# Altium PCB OPAMP_TESTER.PcbDoc
Units mil, origin at the board's own origin, x right, y up, seen from the top; angles counter-clockwise.
Board outline 7760.03 x 6465.03 mil, 2 copper layers (Top Layer, Bottom Layer); 154 components, 57 nets, 554 pads, 0 vias.
Unrouted connection lines stored in the file: 16.
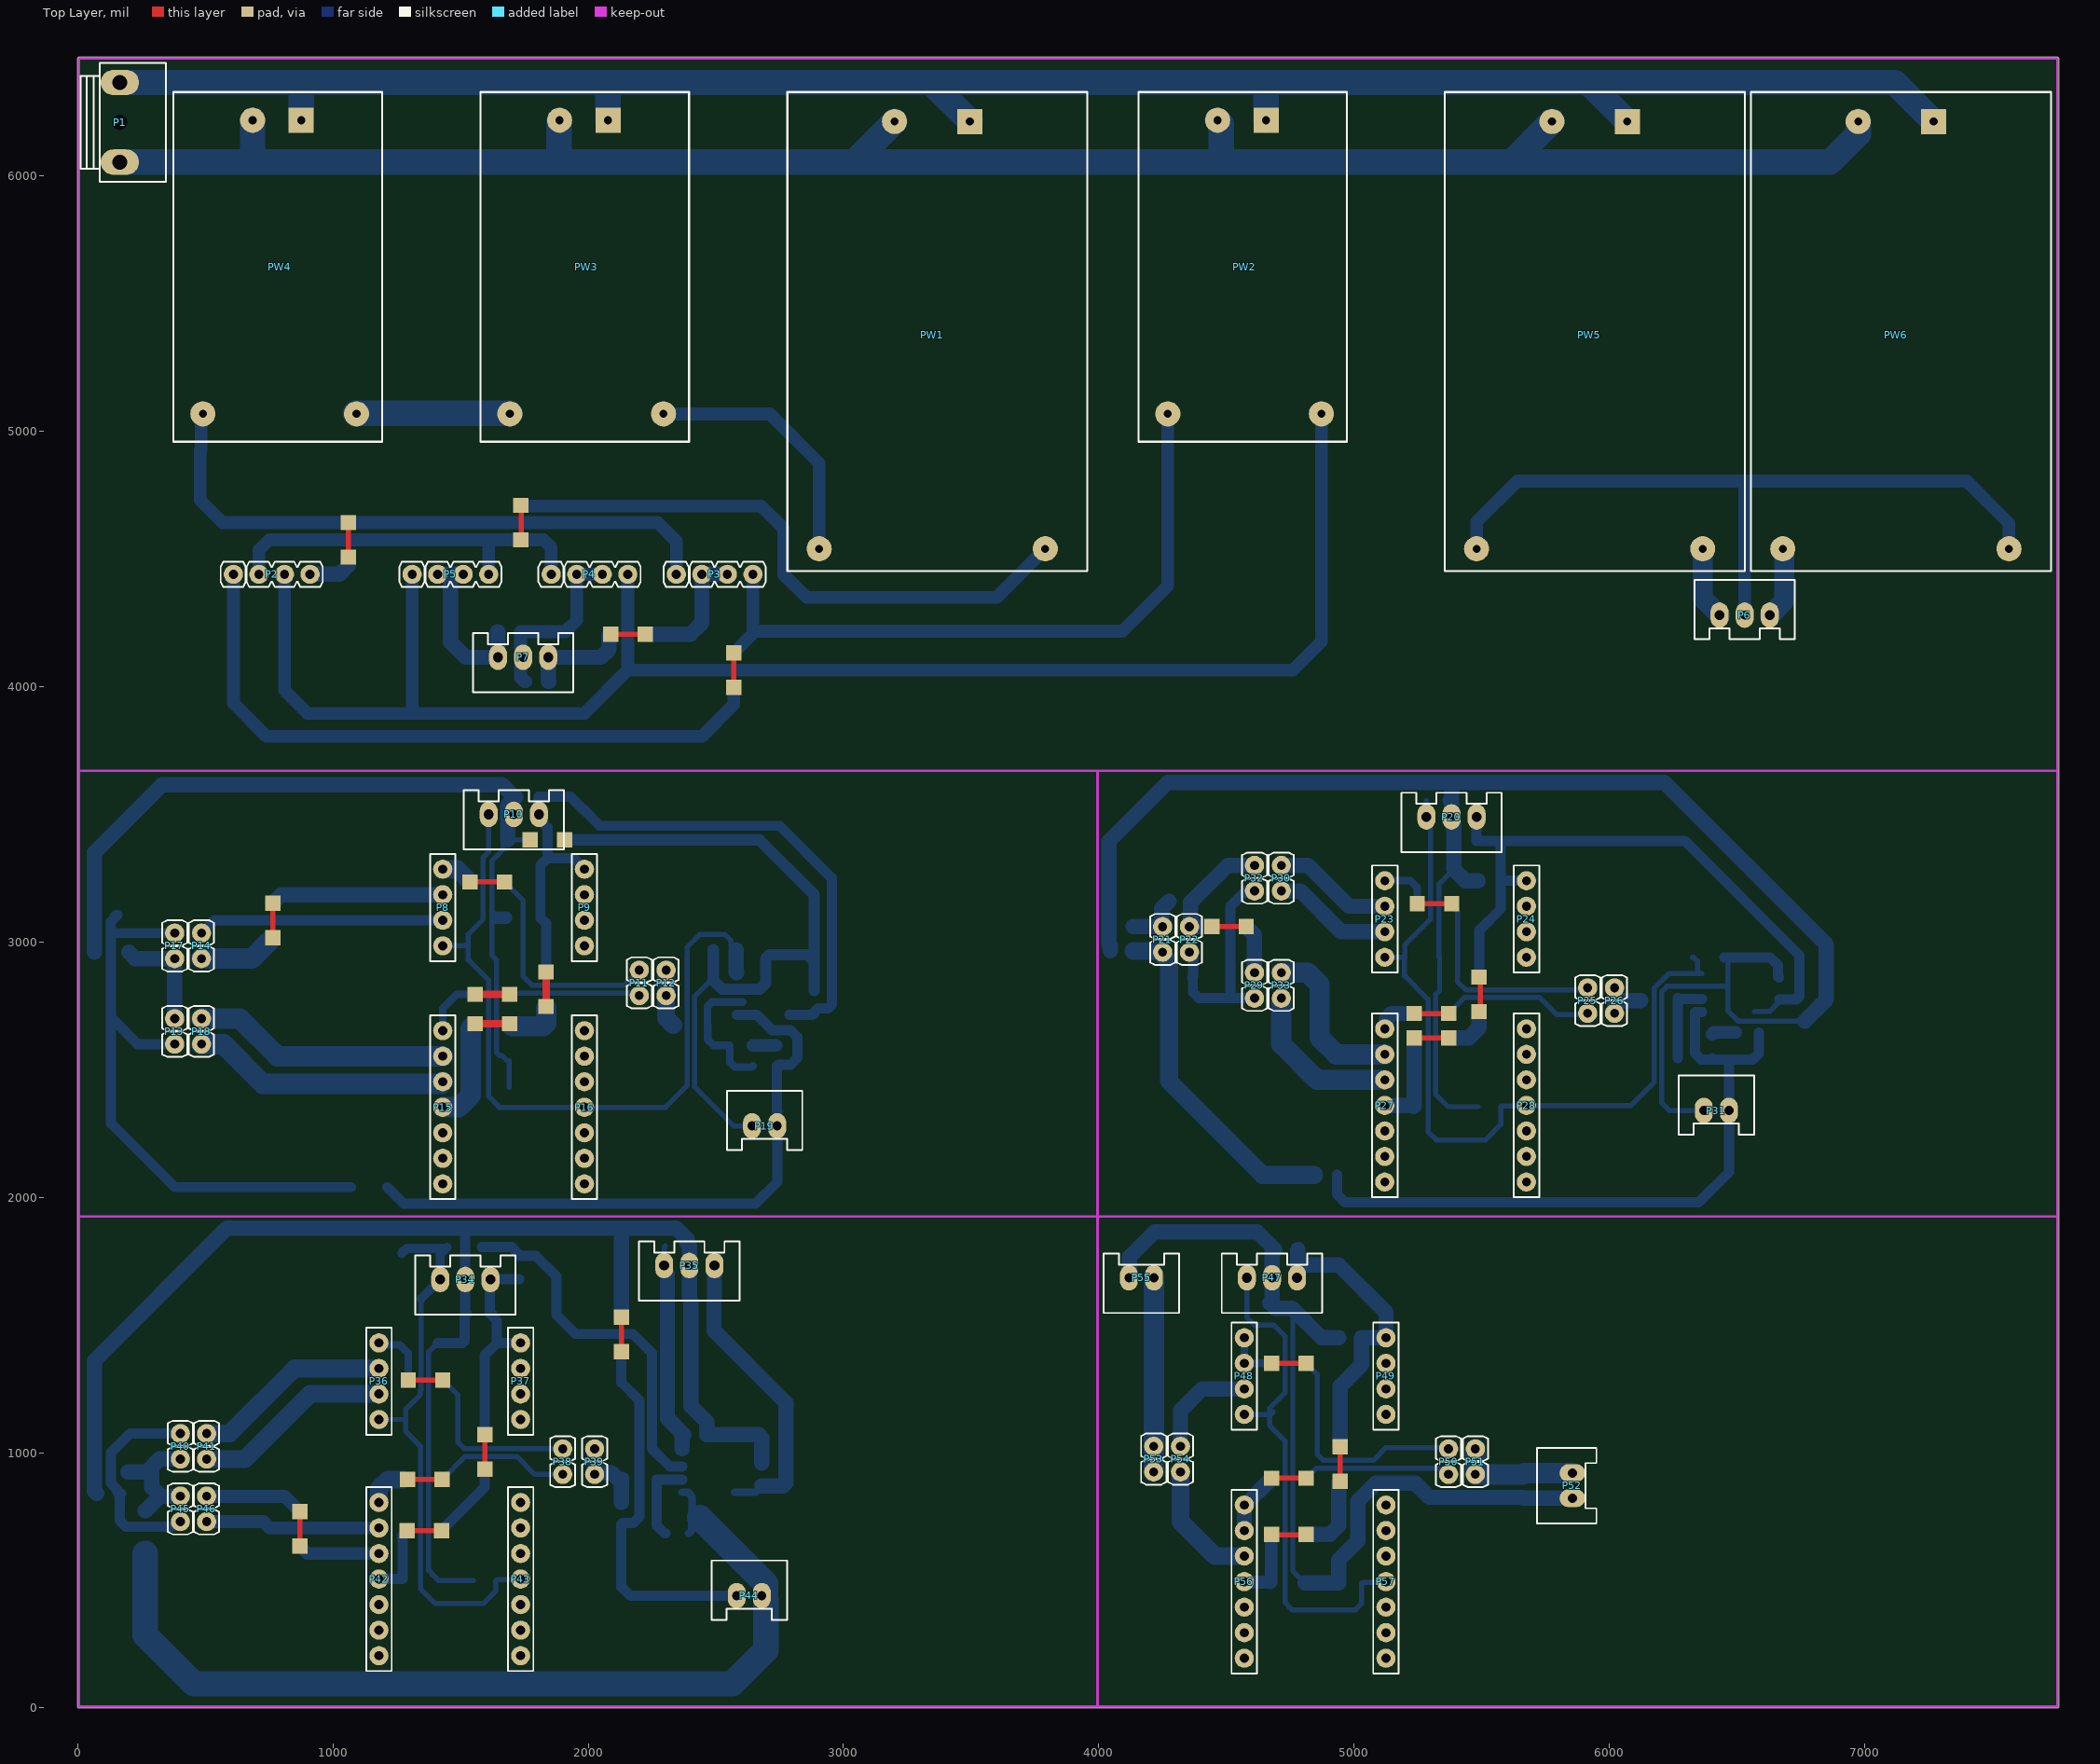
[diagram p0: Top Layer view]
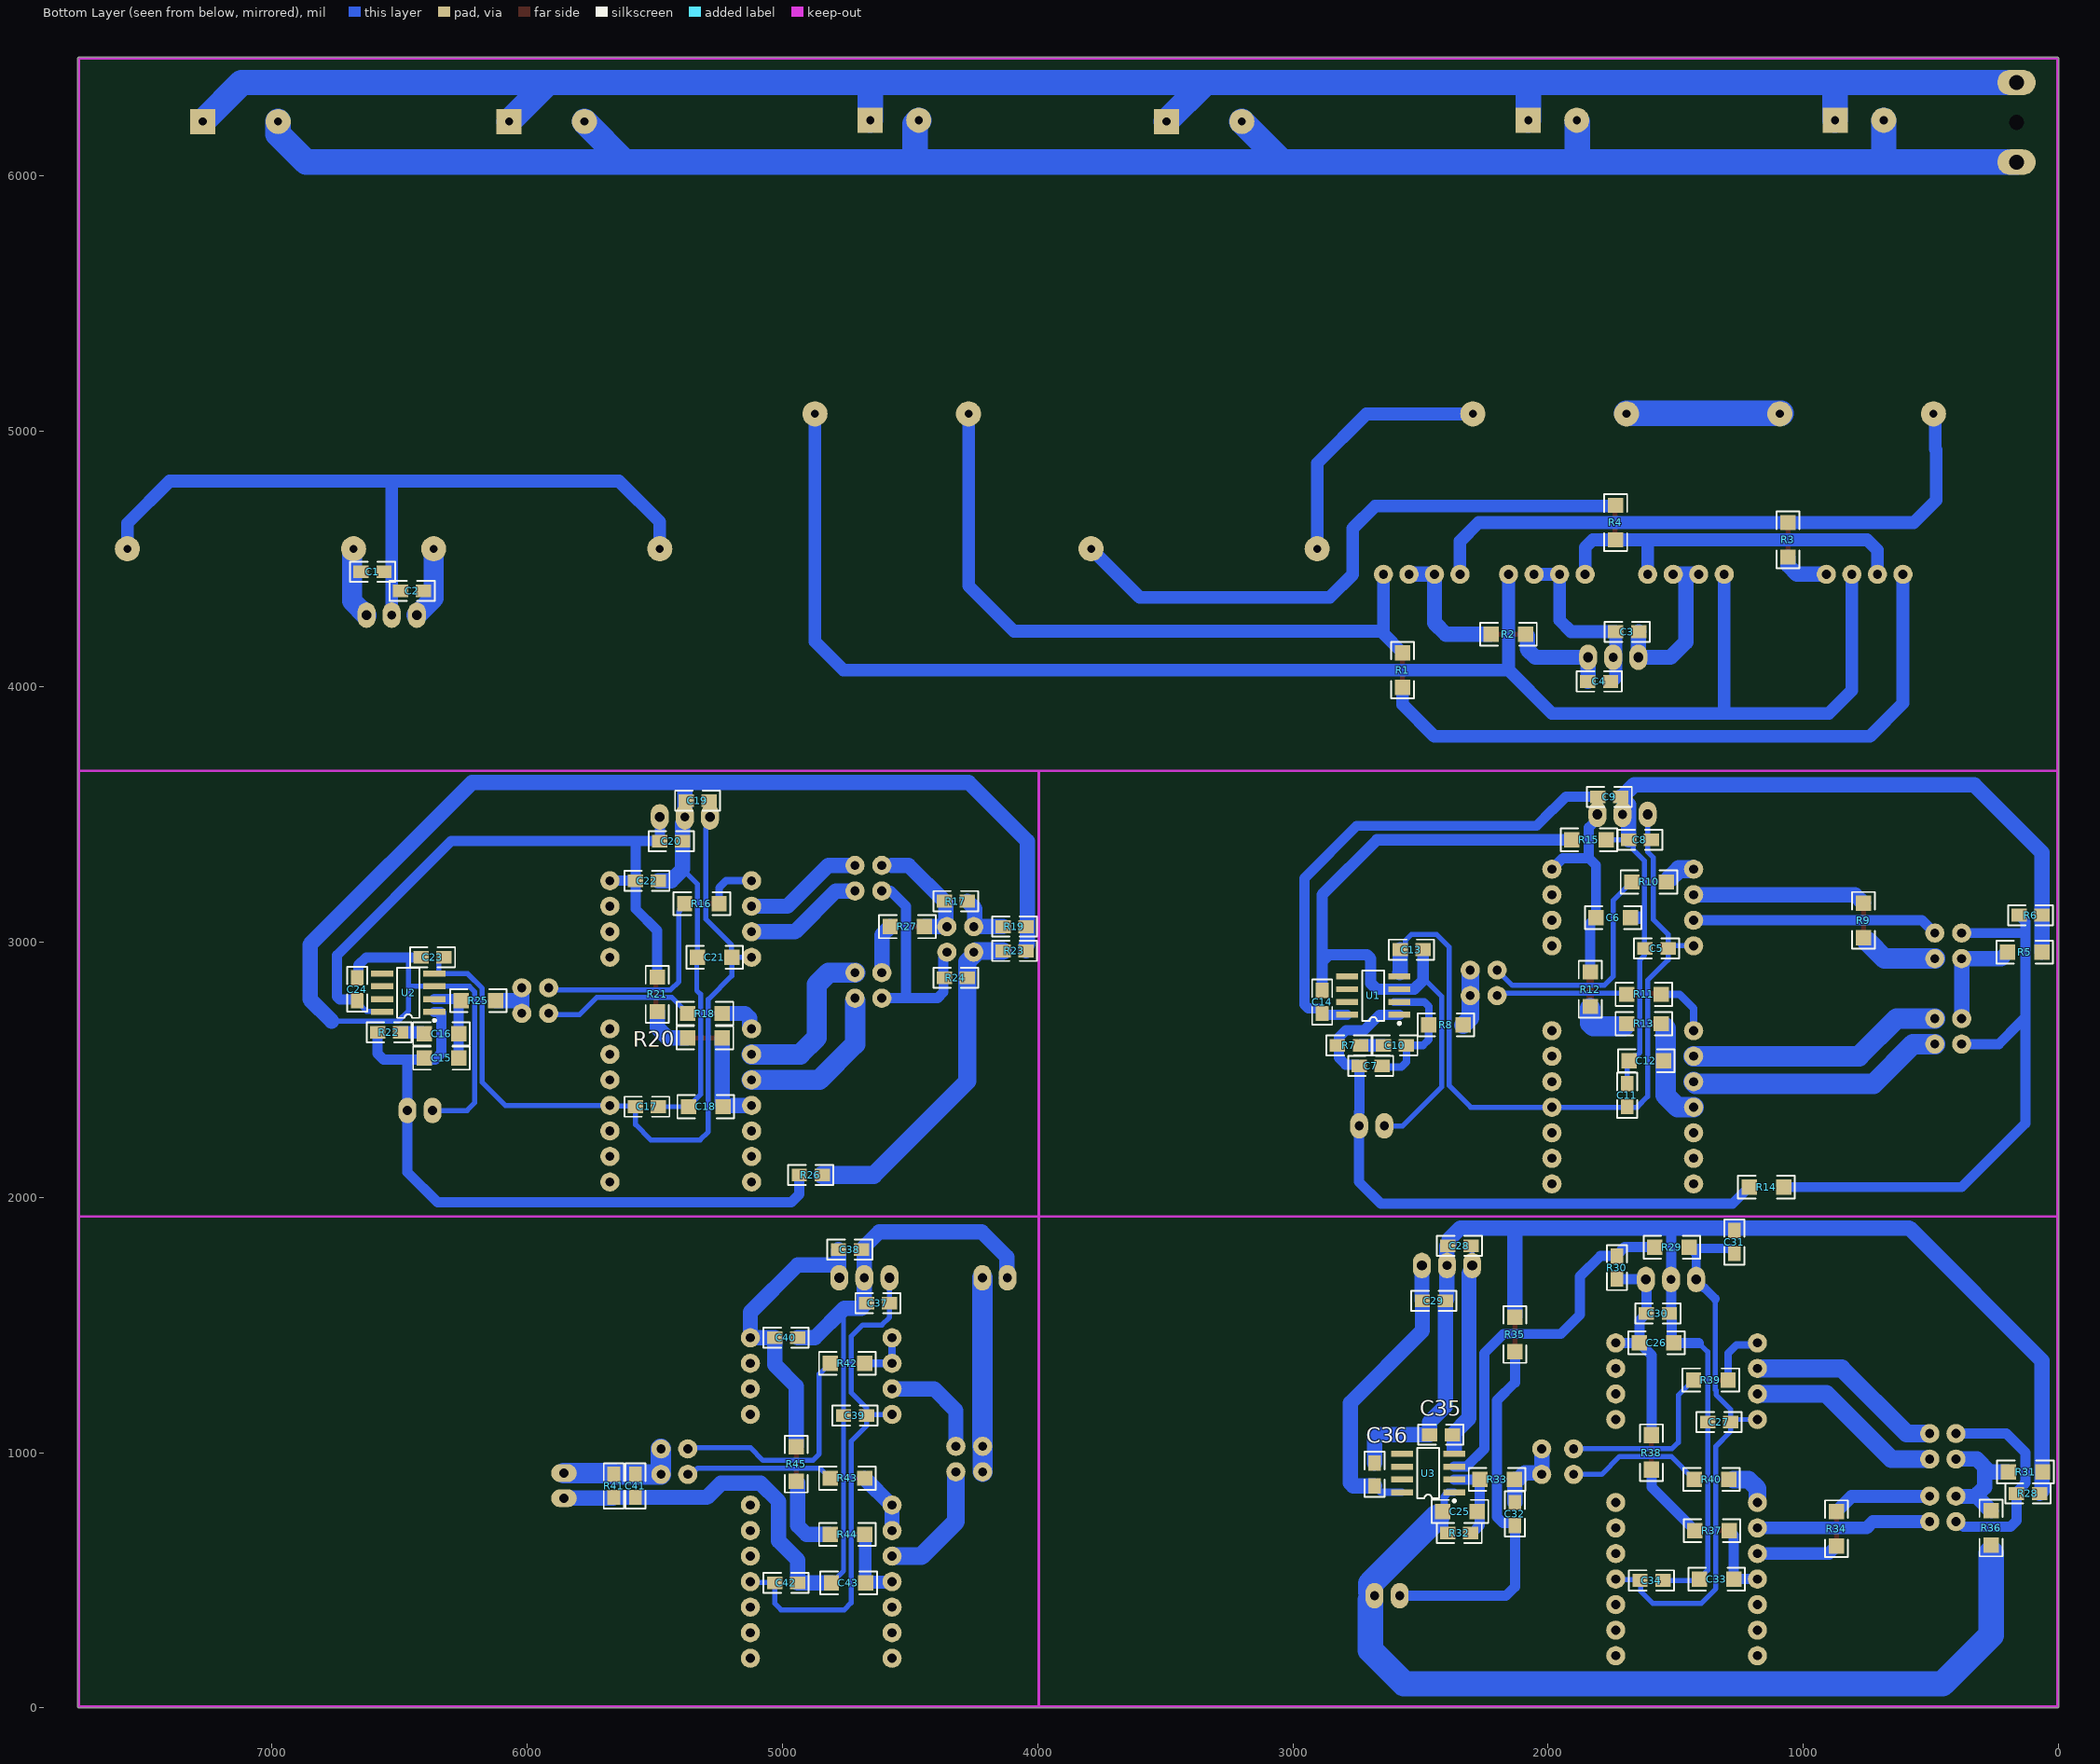
[diagram p1: Bottom Layer view, seen from below]
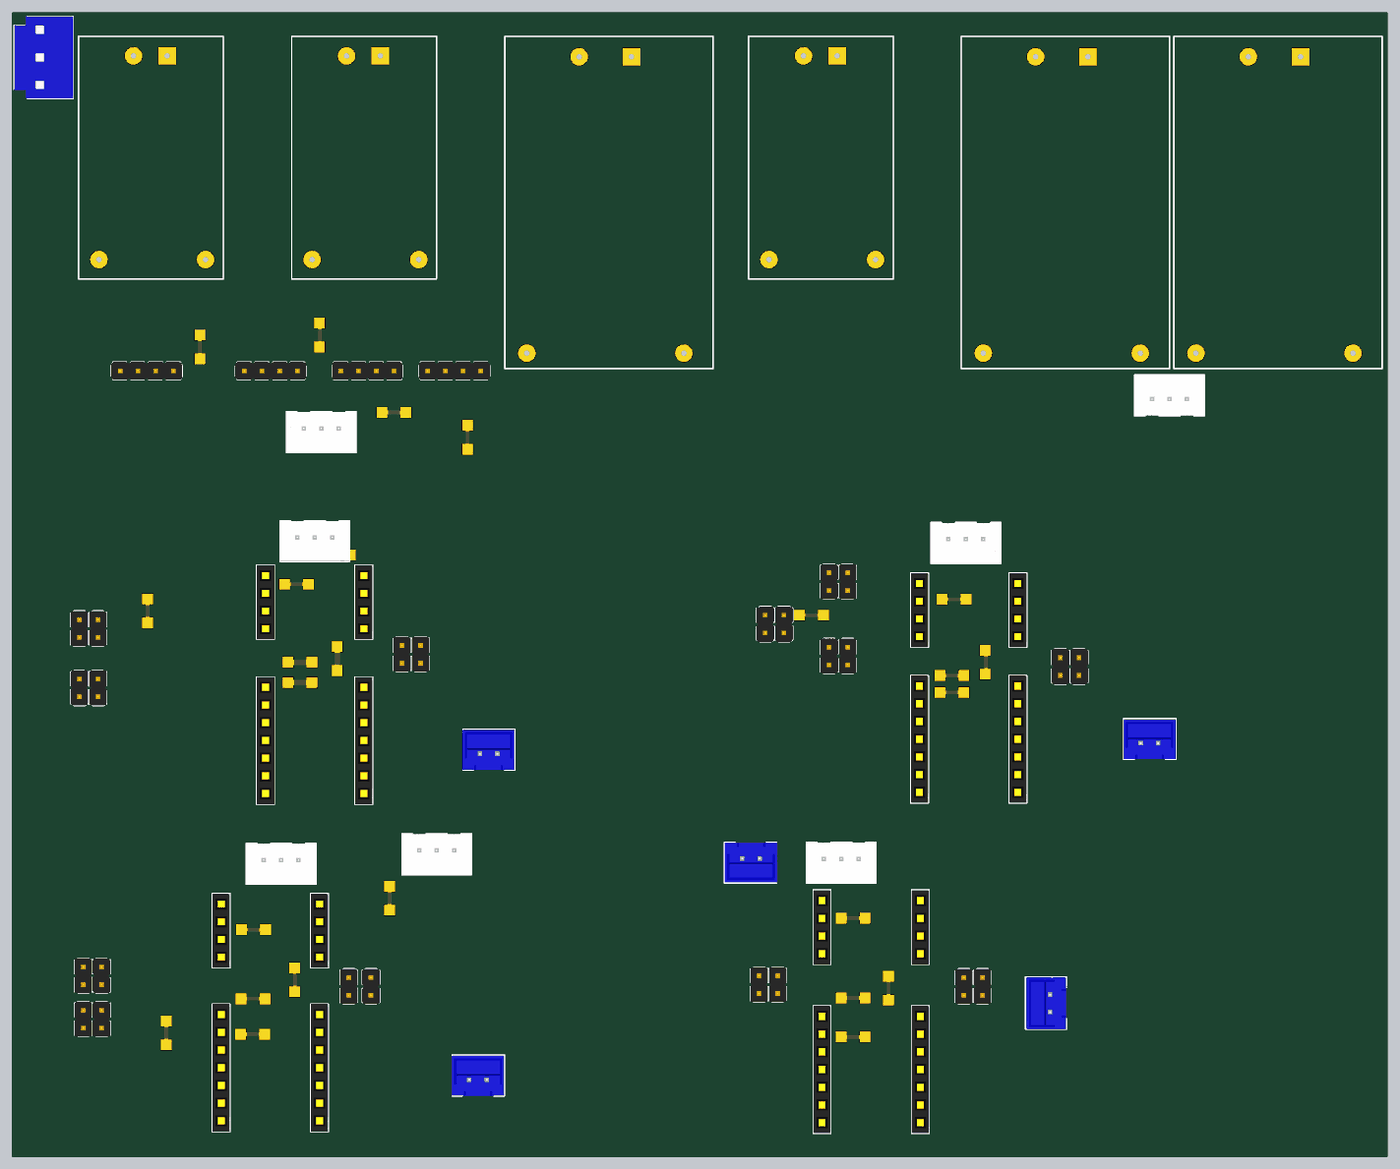
[diagram p2: 3D render of the assembled board from above, using the file's embedded part models]
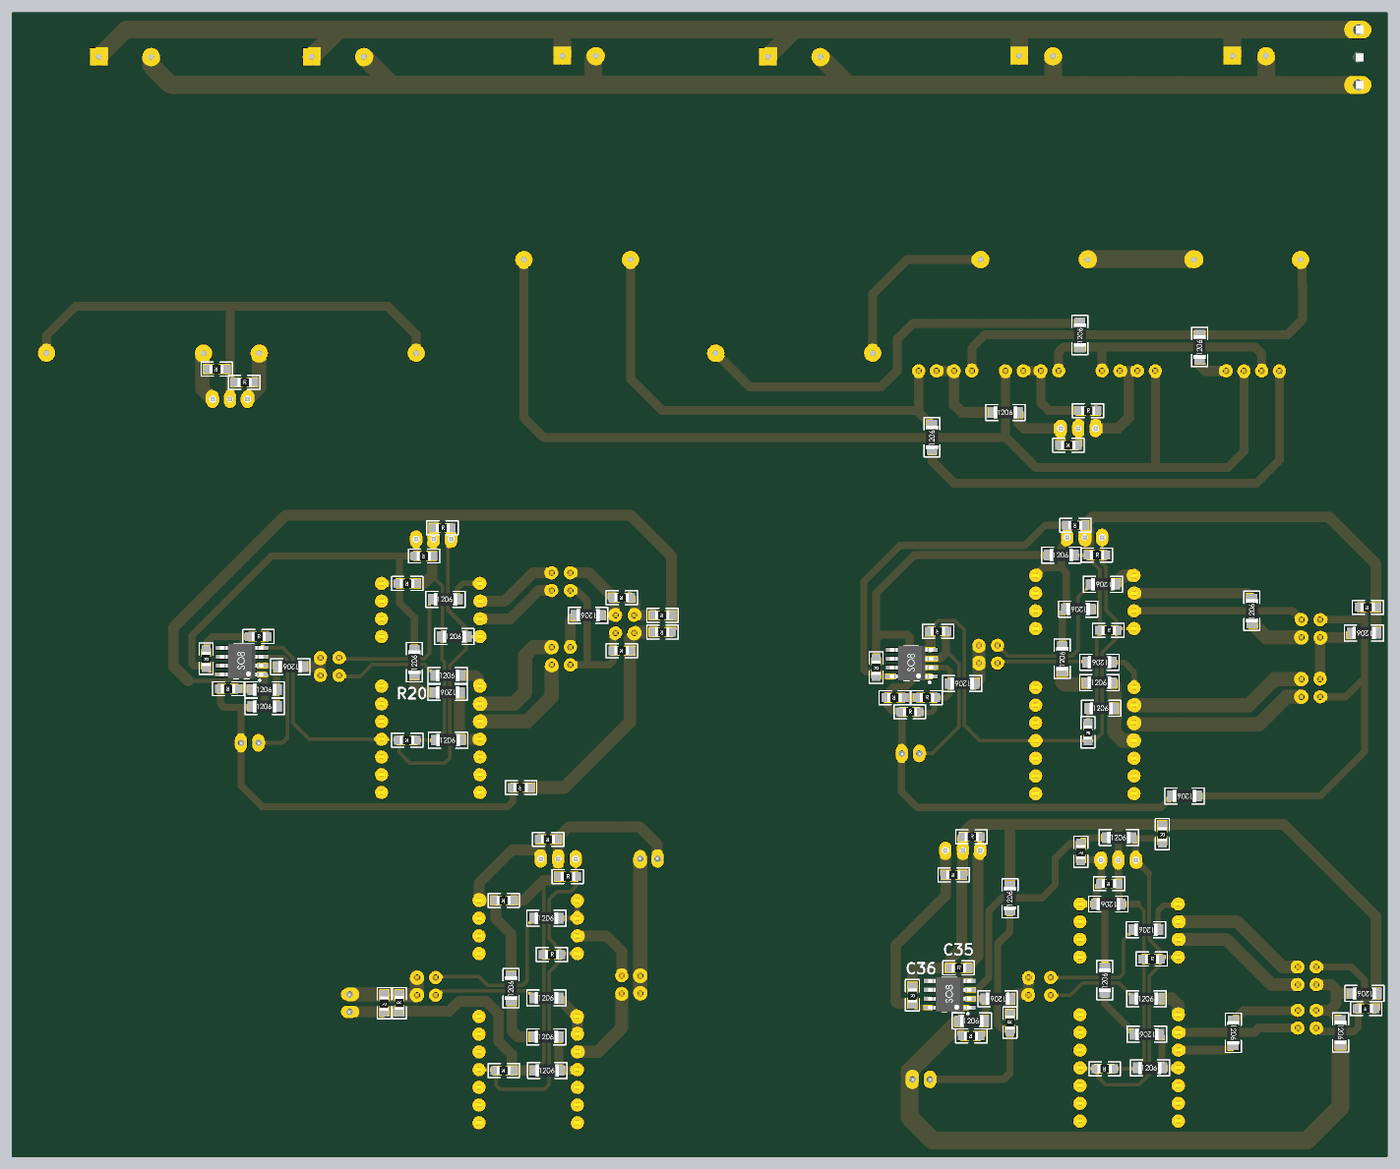
[diagram p3: 3D render of the assembled board from below, using the file's embedded part models]

## Layer stack, top to bottom
Top Solder: solder mask 0.4, Solder Resist, Dk 3.5
Top Layer: signal copper 1.4
Dielectric 1: dielectric 12.6, FR-4, Dk 4.8
Bottom Layer: signal copper 1.4
Bottom Solder: solder mask 0.4, Solder Resist, Dk 3.5

## Board outline
5,-0.01 cw(c5,5) -0.01,5 -0.01,6460 cw(c5,6460) 5,6465.02 7755,6465.02 cw(c7755,6460) 7760.02,6460 7760.02,5 cw(c7755,5) 7755,-0.01

## Design rules (kind name [scope] priority, off if disabled: settings)
Clearance [All] p1: gap=10 ignorepadtopadclearanceinfootprint=FALSE except(0: Arc-Hole Track-Hole SMDPad-Hole THPad-Hole Via-Hole Fill-Hole Poly-Hole Region-Hole Text-Hole)
PolygonConnect [All] p1: connectstyle=Relief reliefconductorwidth=10 reliefentries=4 polygonreliefangle="90 Angle" airgapwidth=10
RoutingVias [All] p1: holewidth=28 width=50 viastyle="Through Hole" minholewidth=28 minwidth=50 maxholewidth=50 maxwidth=500
SolderMaskExpansion [All] p1: expansion=4 istentingtop=FALSE
Width [All] p1: maxlimit=100 minlimit=10 preferedwidth=10
30 further rules are at their usual default settings.

## Classes and differential pairs
component class OPAMP_TESTER: C1 C2 C3 C4 P1 P2 P3 P4 P5 P6 P7 PW1 PW2 PW3 PW4 PW5 PW6 R1 R2 R3 R4
component class OPAMP_TESTER_2: C25 C26 C27 C28 C29 C30 C31 C32 C33 C34 C35 C36 C37 C38 C39 C40 C41 C42 C43 P34 P35 P36 P37 P38 P39 P40 P41 P42 P43 P44 P45 P46 P47 P48 P49 P50 P51 P52 P53 P54 P55 P56 P57 R28 R29 R30 R31 R32 R33 R34 R35 R36 R37 R38 R39 R40 R41 R42 R43 R44 R45 U3
component class OPAMP_TESTER_1: C5 C6 C7 C8 C9 C10 C11 C12 C13 C14 C15 C16 C17 C18 C19 C20 C21 C22 C23 C24 P8 P9 P10 P11 P12 P13 P14 P15 P16 P17 P18 P19 P20 P21 P22 P23 P24 P25 P26 P27 P28 P29 P30 P31 P32 P33 R5 R6 R7 R8 R9 R10 R11 R12 R13 R14 R15 R16 R17 R18 R19 R20 R21 R22 R23 R24 R25 R26 R27 U1 U2

## Components (designator, comment, footprint, x,y, rotation, side; value= is the part's Value field where it differs from the comment)
C1 "100nF" "SMD 0805" 6605,4450 r0 bottom
C2 "100nF" "SMD 0805" 6450,4375 r180 bottom
C3 "100nF" "SMD 0805" 1690,4215 r180 bottom
C4 "100nF" "SMD 0805" 1800,4020 r0 bottom
C5 "100nF" "SMD 0805" 1575,2975 r180 bottom
C6 "100nF" "SMD 1206" 1745,3095 r0 bottom
C7 "1uF" "SMD 0805" 2695,2515 r180 bottom
C8 "100nF" "SMD 0805" 1640,3400 r180 bottom
C9 "100nF" "SMD 0805" 1760.21,3568.31 r0 bottom
C10 "1uF" "SMD 0805" 2600,2595 r180 bottom
C11 "100nF" "SMD 0805" 1690,2400 r270 bottom
C12 "100nF" "SMD 1206" 1615,2535 r180 bottom
C13 "100nF" "SMD 0805" 2535,2970 r0 bottom
C14 "100nF" "SMD 0805" 2885,2765 r270 bottom
C15 "1uF" "SMD 1206" 6335,2545 r180 bottom
C16 "1uF" "SMD 1206" 6335,2640 r180 bottom
C17 "100nF" "SMD 0805" 5530,2355 r0 bottom
C18 "100nF" "SMD 1206" 5300,2355 r180 bottom
C19 "100nF" "SMD 0805" 5331.66,3553.67 r180 bottom
C20 "100nF" "SMD 0805" 5435,3395 r0 bottom
C21 "100nF" "SMD 1206" 5265,2940 r180 bottom
C22 "100nF" "SMD 0805" 5530,3240 r0 bottom
C23 "100nF" "SMD 0805" 6370,2940 r180 bottom
C24 "100nF" "SMD 0805" 6665,2815 r270 bottom
C25 "1uF" "SMD 1206" 2345,770 r180 bottom
C26 "100nF" "SMD 1206" 1575,1430 r0 bottom
C27 "100nF" "SMD 0805" 1330,1120 r180 bottom
C28 "100nF" "SMD 0805" 2347.5,1809.77 r180 bottom
C29 "100nF" "SMD 0805" 2447.5,1594.77 r0 bottom
C30 "100nF" "SMD 0805" 1570,1545 r0 bottom
C31 "100nF" "SMD 0805" 1270,1825 r270 bottom
C32 "1uF" "SMD 0805" 2130,760 r90 bottom
C33 "100nF" "SMD 1206" 1340,505 r180 bottom
C34 "100nF" "SMD 0805" 1595,500 r0 bottom
C35 "100nF" "SMD 0805" 2420,1070 r180 bottom
C36 "100nF" "SMD 0805" 2680,915 r270 bottom
C37 "100nF" "SMD 0805" 4625,1585 r180 bottom
C38 "100nF" "SMD 0805" 4735,1795 r0 bottom
C39 "100nF" "SMD 0805" 4715,1145 r180 bottom
C40 "100nF" "SMD 0805" 4985,1450 r0 bottom
C41 "100pF" "SMD 0805" 5575,870 r90 bottom
C42 "100nF" "SMD 0805" 4985,490 r0 bottom
C43 "100nF" "SMD 1206" 4740,490 r180 bottom
P1 "CONNECTOR 3" "CON VH 3" 165,6054.09 r90 top
P2 "CONNECTOR 4" "CON HDR 2.54M 4" 610,4440 r0 top
P3 "CONNECTOR 4" "CON HDR 2.54M 4" 2345,4440 r0 top
P4 "CONNECTOR 4" "CON HDR 2.54M 4" 1855,4440 r0 top
P5 "CONNECTOR 4" "CON HDR 2.54M 4" 1310,4440 r0 top
P6 "INPUT_12+-V" "CON XH 3" 6628.43,4280 r180 top
P7 "INPUT_12+-V" "CON XH 3" 1646.57,4115 r0 top
P8 "LM358_DUT" "CON HDR 2.54FM 4" 1430,3285 r270 top
P9 "LM358DUT" "CON HDR 2.54FM 4" 1985,3285 r270 top
P10 "INPUT_12+-V" "CON XH 3" 1610,3500 r0 top
P11 "CONNECTOR 2" "CON HDR 2.54M 2" 2200,2890 r270 top
P12 "CONNECTOR 2" "CON HDR 2.54M 2" 2305,2790 r90 top
P13 "CONNECTOR 2" "CON HDR 2.54M 2" 380,2700 r270 top
P14 "CONNECTOR 2" "CON HDR 2.54M 2" 485,3035 r270 top
P15 "LM324_DUT" "CON HDR 2.54FM 7" 1430,2652.78 r270 top
P16 "LM324_DUT" "CON HDR 2.54FM 7" 1985,2652.78 r270 top
P17 "CONNECTOR 2" "CON HDR 2.54M 2" 380,2935 r90 top
P18 "CONNECTOR 2" "CON HDR 2.54M 2" 485,2600 r90 top
P19 "SAMPLE_OUT" "CON XH 2" 2740,2280 r180 top
P20 "INPUT_12+-V" "CON XH 3" 5283.15,3490 r0 top
P21 "CONNECTOR 2" "CON HDR 2.54M 2" 4250,3060 r270 top
P22 "CONNECTOR 2" "CON HDR 2.54M 2" 4355,2960 r90 top
P23 "LM358_DUT" "CON HDR 2.54FM 4" 5120,3240 r270 top
P24 "LM358DUT" "CON HDR 2.54FM 4" 5675,3240 r270 top
P25 "CONNECTOR 2" "CON HDR 2.54M 2" 5915,2820.49 r270 top
P26 "CONNECTOR 2" "CON HDR 2.54M 2" 6020.16,2720.49 r90 top
P27 "LM324_DUT" "CON HDR 2.54FM 7" 5120,2660 r270 top
P28 "LM324_DUT" "CON HDR 2.54FM 7" 5675,2660 r270 top
P29 "CONNECTOR 2" "CON HDR 2.54M 2" 4610,2880 r270 top
P30 "CONNECTOR 2" "CON HDR 2.54M 2" 4715,3200 r90 top
P31 "SAMPLE_OUT" "CON XH 2" 6468.43,2340 r180 top
P32 "CONNECTOR 2" "CON HDR 2.54M 2" 4610,3300 r270 top
P33 "CONNECTOR 2" "CON HDR 2.54M 2" 4715,2780 r90 top
P34 "INPUT_25V,5V" "CON XH 3" 1420,1678.19 r0 top
P35 "INPUT_12+-V" "CON XH 3" 2297.46,1732.96 r0 top
P36 "LM358_DUT" "CON HDR 2.54FM 4" 1180,1430 r270 top
P37 "LM358DUT" "CON HDR 2.54FM 4" 1735,1430 r270 top
P38 "CONNECTOR 2" "CON HDR 2.54M 2" 1900,1015 r270 top
P39 "CONNECTOR 2" "CON HDR 2.54M 2" 2025,1015 r270 top
P40 "CONNECTOR 2" "CON HDR 2.54M 2" 402.33,1075 r270 top
P41 "CONNECTOR 2" "CON HDR 2.54M 2" 505,975 r90 top
P42 "LM324_DUT" "CON HDR 2.54FM 7" 1180,805 r270 top
P43 "LM324_DUT" "CON HDR 2.54FM 7" 1735,805 r270 top
P44 "SAMPLE_OUT" "CON XH 2" 2680,440 r180 top
P45 "CONNECTOR 2" "CON HDR 2.54M 2" 402.33,730 r90 top
P46 "CONNECTOR 2" "CON HDR 2.54M 2" 505,830 r270 top
P47 "INPUT_12+-V" "CON XH 3" 4580,1685 r0 top
P48 "LM358_DUT" "CON HDR 2.54FM 4" 4570,1450 r270 top
P49 "LM358DUT" "CON HDR 2.54FM 4" 5125,1450 r270 top
P50 "CONNECTOR 2" "CON HDR 2.54M 2" 5370,1015 r270 top
P51 "CONNECTOR 2" "CON HDR 2.54M 2" 5475,915 r90 top
P52 "SAMPLE_OUT" "CON XH 2" 5855,920 r270 top
P53 "CONNECTOR 2" "CON HDR 2.54M 2" 4215,925 r90 top
P54 "CONNECTOR 2" "CON HDR 2.54M 2" 4320,925 r90 top
P55 "INPUT_15V_100KHz" "CON XH 2" 4117.83,1685 r0 top
P56 "LM324_DUT" "CON HDR 2.54FM 7" 4570,795 r270 top
P57 "LM324_DUT" "CON HDR 2.54FM 7" 5125,795 r270 top
PW1 "15V_PW" POW_15V 3495,6328.23 r270 top
PW2 "15V_PW" POW_5V 4870.28,6328.23 r270 top
PW3 "15V_PW" POW_5V 2292.78,6328.23 r270 top
PW4 "15V_PW" POW_5V 1090.28,6328.23 r270 top
PW5 "15V_PW" POW_15V 6070.28,6328.23 r270 top
PW6 "15V_PW" POW_15V 7270,6328.23 r270 top
R1 "0R" "SMD 1206" 2570,4065 r90 bottom
R2 "0R" "SMD 1206" 2155,4205 r180 bottom
R3 "0R" "SMD 1206" 1060,4575 r90 bottom
R4 "0R" "SMD 1206" 1735,4642.5 r90 bottom
R5 "120R_1%" "SMD 1206" 132.5,2959.85 r0 bottom
R6 "120R_1%" "SMD 0805" 110,3105 r0 bottom
R7 "100K" "SMD 0805" 2780,2595 r0 bottom
R8 "100K" "SMD 1206" 2400,2675 r0 bottom
R9 "0R" "SMD 1206" 765,3085 r90 bottom
R10 "0R" "SMD 1206" 1605,3235 r0 bottom
R11 "0R" "SMD 1206" 1625,2795 r0 bottom
R12 "0R" "SMD 1206" 1835,2815 r90 bottom
R13 "0R" "SMD 1206" 1625,2680 r180 bottom
R14 "100K_1%" "SMD 1206" 1145,2040 r0 bottom
R15 "0R" "SMD 1206" 1840,3400 r180 bottom
R16 "0R" "SMD 1206" 5315,3150 r180 bottom
R17 "1Meg" "SMD 0805" 4320,3160 r0 bottom
R18 "0R" "SMD 1206" 5302.5,2720 r180 bottom
R19 "100R" "SMD 0805" 4090,3060 r0 bottom
R20 "0R" "SMD 1206" 5302.5,2625 r0 bottom
R21 "0R" "SMD 1206" 5490,2795 r90 bottom
R22 "10K" "SMD 0805" 6540,2645.63 r0 bottom
R23 "100R" "SMD 0805" 4090,2965 r0 bottom
R24 "1Meg" "SMD 0805" 4320,2860 r0 bottom
R25 "10K" "SMD 1206" 6190,2770 r0 bottom
R26 "10K" "SMD 0805" 4888.51,2087.64 r0 bottom
R27 "0R" "SMD 1206" 4510,3060 r0 bottom
R28 "100R" "SMD 0805" 120,840 r0 bottom
R29 "20K" "SMD 1206" 1515,1805 r180 bottom
R30 "20K" "SMD 0805" 1730,1725 r270 bottom
R31 "100R" "SMD 1206" 130,925 r0 bottom
R32 "10K" "SMD 0805" 2348.19,685 r0 bottom
R33 "10K" "SMD 1206" 2200,895 r0 bottom
R34 "0R" "SMD 1206" 870,702.5 r270 bottom
R35 "0R" "SMD 1206" 2130,1462.5 r90 bottom
R36 "10K" "SMD 1206" 265,705 r270 bottom
R37 "0R" "SMD 1206" 1357.5,695 r0 bottom
R38 "0R" "SMD 1206" 1595,1000 r90 bottom
R39 "0R" "SMD 1206" 1362.5,1285 r0 bottom
R40 "0R" "SMD 1206" 1360,895 r180 bottom
R41 "2K" "SMD 0805" 5660,870 r270 bottom
R42 "0R" "SMD 1206" 4745,1350 r180 bottom
R43 "0R" "SMD 1206" 4745,900 r180 bottom
R44 "0R" "SMD 1206" 4745,680 r180 bottom
R45 "0R" "SMD 1206" 4945,955 r90 bottom
U1 "IC LM358" "SMD IC SOP8" 2685,2790 r90 bottom
U2 "IC LM358" "SMD IC SOP8" 6465,2801.18 r90 bottom
U3 "IC LM358" "SMD IC SOP8" 2470,920 r90 bottom

## Footprints (in the part's own frame and the unit in brackets; to place one, negate y for a bottom-side part, rotate by r counter-clockwise, add the part's x,y. Pads: shape width x height; smd on the part's side, far side on the other; paste and mask are expansions set on the pad)
"CON HDR 2.54FM 4" [mm] "CONNECTOR PTCH:2.54MM"
  round 1.905 hole 0.9: 1(0,0) 2(2.54,0) 3(5.08,0) 4(7.62,0)
  silkscreen extent -1.52,-1.27 9.14,1.27, body extent -1.5,-1.24 9.16,1.26, height 5
"CON HDR 2.54FM 7" [mm] "CONNECTOR PTCH:2.54MM"
  round 1.905 hole 0.9: 1(0,0) 2(2.54,0) 3(5.08,0) 4(7.62,0) 5(10.16,0) 6(12.7,0) 7(15.24,0)
  silkscreen extent -1.52,-1.27 16.76,1.27, body extent -1.54,-1.24 16.74,1.26, height 5
"CON HDR 2.54M 2" [mm] "CONNECTOR PTCH:2.54MM"
  round 1.905 hole 0.9: 1(0,0) 2(2.54,0)
  silkscreen extent -1.27,-1.25 3.81,1.25, body extent -1.27,-1.27 3.81,1.27, height 8.89
"CON HDR 2.54M 4" [mm] "CONNECTOR PTCH:2.54MM"
  round 1.905 hole 0.9: 1(0,0) 2(2.54,0) 3(5.08,0) 4(7.62,0)
  silkscreen extent -1.27,-1.25 8.89,1.25, body extent -1.27,-1.27 8.89,1.27, height 8.89
"CON VH 3" [mm] "CONNECTOR PITCH:3.96MM"
  oval 2.54x3.81 hole 1.5: 1(0,0) 3(7.92,0)
  round 0 hole 1.5: 2(3.96,0)
  silkscreen extent -1.95,-4.6 9.87,3.9, body extent -1.95,-4.6 9.87,3.9, height 10.9
"CON XH 2" [mm] "CONNECTOR PITCH:2.5MM"
  oval 1.778x2.54 hole 0.9: 1(0,0) 2(2.5,0)
  silkscreen extent -2.5,-3.5 5,2.4, body extent -2.45,-3.35 5.05,2.35, height 7
"CON XH 3" [mm] "CONNECTOR PITCH:2.5MM"
  oval 1.778x2.54 hole 1: 1(0,0) 3(5,0)
  oval 1.778x2.54 hole 0.9: 2(2.5,0)
  silkscreen extent -2.5,-3.5 7.5,2.4, body extent -2.46,-3.41 7.44,2.34, height 7
POW_5V [mm]
  rect 2.5x2.5 hole 0.8: 1(2.794,-5.461)
  round 2.5 hole 0.8: 2(2.794,-10.287) 3(32.004,-15.24) 4(32.004,0.046)
  silkscreen extent 0,-18.16 34.77,2.59
POW_15V [mm]
  rect 2.5x2.5 hole 0.8: 1(2.921,0)
  round 2.5 hole 0.8: 2(2.921,-7.5) 3(45.421,-15) 4(45.421,7.5)
  silkscreen extent 0,-18.16 47.63,11.68
"SMD 0805" [mil] "SMD 0805"
  round 27.56 on Mech2: 0(0,0)
  rect 60x50 smd: 1(-45,0) 2(45,0)
  silkscreen extent -88,-39 88,39, body extent -57,-28 61,27, height 21
"SMD 1206" [mil] "SMD 1206"
  round 27.56 on Mech2: 0(0,0)
  rect 60x60 smd: 1(-67.5,0) 2(67.5,0)
  silkscreen extent -111,-45 111,45, body extent -66,-34 66,34, height 33
"SMD IC SOP8" [mm] "SOP, 8-Leads , Pitch 1.27mm"
  rect 0.6x2.2 smd: 1(-1.905,-2.6) 2(-0.635,-2.6) 3(0.635,-2.6) 4(1.905,-2.6) 5(1.905,2.6) 6(0.635,2.6) 7(-0.635,2.6) 8(-1.905,2.6)
  round 1.5 on Mech2: 4(-1.3,0) 4(1.3,0)
  silkscreen extent -2.88,-2.72 2.5,1.1, body extent -2.5,-3.1 2.5,3.1, height 1.75

## Part data
C1 C2 C3 C4 C5 C6 C7 C8 C9 C10 C11 C12 C13 C14 C15 C16 C17 C18 C19 C20 C21 C22 C23 C24 C25 C26 C27 C28 C29 C30 C31 C32 C33 C34 C35 C36 C37 C38 C39 C40 C41 C42 C43: library part CAP, "Capacitor", LatestRevisionDate=17-Jul-2002, LatestRevisionNote="Re-released for DXP Platform.", PackageDescription="Radial Cap, Thru-Hole; 2 Leads; 0.3 in Pin Spacing", PackageReference=RAD-0.3, Published=8-Jun-2000, Publisher="Altium Limited"
P1: "Header, 3-Pin", LatestRevisionDate=17-Jul-2002, LatestRevisionNote="Re-released for DXP Platform.", Publisher="Altium Limited"
P2 P3 P4 P5: "Header, 4-Pin", LatestRevisionDate=17-Jul-2002, LatestRevisionNote="Re-released for DXP Platform.", Publisher="Altium Limited"
P6 P7 P10 P20 P34 P35 P47: library part "CONNECTOR 3", "Header, 3-Pin", LatestRevisionDate=17-Jul-2002, LatestRevisionNote="Re-released for DXP Platform.", Publisher="Altium Limited"
P8 P9 P23 P24 P36 P37 P48 P49: library part "CONNECTOR 4", "Header, 4-Pin", LatestRevisionDate=17-Jul-2002, LatestRevisionNote="Re-released for DXP Platform.", Publisher="Altium Limited"
P11 P12 P13 P14 P17 P18 P21 P22 P25 P26 P29 P30 P32 P33 P38 P39 P40 P41 P45 P46 P50 P51 P53 P54: "Header, 2-Pin", LatestRevisionDate=17-Jul-2002, LatestRevisionNote="Re-released for DXP Platform.", Publisher="Altium Limited"
P15 P16 P27 P28 P42 P43 P56 P57: library part "CONNECTOR 7", "Header, 7-Pin", LatestRevisionDate=17-Jul-2002, LatestRevisionNote="Re-released for DXP Platform.", Publisher="Altium Limited"
P19 P31 P44 P52 P55: library part "CONNECTOR 2", "Header, 2-Pin", LatestRevisionDate=17-Jul-2002, LatestRevisionNote="Re-released for DXP Platform.", Publisher="Altium Limited"
PW1 PW2 PW3 PW4 PW5 PW6: library part POWER
R1 R2 R3 R4 R5 R6 R7 R8 R9 R10 R11 R12 R13 R14 R15 R16 R17 R18 R19 R20 R21 R22 R23 R24 R25 R26 R27 R28 R29 R30 R31 R32 R33 R34 R35 R36 R37 R38 R39 R40 R41 R42 R43 R44 R45: library part RES, "Resistor"

## Free pads (board coordinates)
  rect 60x60 all layers, no hole: 2(765,3017.5) 2(765,3152.5) 2(870,635) 2(870,770) 2(1060,4507.5) 2(1060,4642.5) 2(1290,695) 2(1292.5,895) 2(1295,1285) 2(1425,695) 2(1427.5,895) 2(1430,1285) 2(1537.5,3235) 2(1557.5,2680) 2(1557.5,2795) 2(1595,935) 2(1595,1070) 2(1672.5,3235) 2(1692.5,2680) 2(1692.5,2795) 2(1735,4575) 2(1735,4710) 2(1772.5,3400) 2(1835,2747.5) 2(1835,2882.5) 2(1907.5,3400) 2(2087.5,4205) 2(2130,1395) 2(2130,1530) 2(2222.5,4205) 2(2570,3997.5) 2(2570,4132.5) 2(4442.5,3060) 2(4577.5,3060) 2(4677.5,680) 2(4677.5,900) 2(4677.5,1350) 2(4812.5,680) 2(4812.5,900) 2(4812.5,1350) 2(4945,887.5) 2(4945,1022.5) 2(5235,2625) 2(5235,2720) 2(5247.5,3150) 2(5370,2625) 2(5370,2720) 2(5382.5,3150) 2(5490,2727.5) 2(5490,2862.5)

## Nets (pads, with @x,y where several pads share a name; then routed paths per layer and width w, separated by ;. In a path a pad name is that pad's centre, name@x,y a point inside that pad or via, vN(x,y) a via of type N, cw(c..) or ccw(c..) an arc to the next point about the centre after c; other vN are vias at no path point)
5+: P2.1 P3.4 pad.2@2570,3997.5 pad.2@2570,4132.5 PW2.3 R1.1 R1.2 | length 5487.9
  Top Layer w20: pad.2@2570,4000 2570,4132.5 pad.2@2570,4135
  Bottom Layer w50: P2.1 610,3935 740,3805 2445,3805 2570,3930 R1.1 ; R1.2 2645,4207.5 ; P3.4 2645,4207.5 ; PW2.3 4270.28,4395 4092.64,4217.36 2654.86,4217.36 2645,4207.5
5-: P2.3 P4.4 P5.1 PW2.4 | length 6482.8
  Bottom Layer w50: P2.3 810,3985 900,3895 1310,3895 ; P5.1 1310,3895 ; P4.4 2155,4065 ; PW2.4 4872.08,4176.37 4760.71,4065 2155,4065 ; 1310,3895 1985,3895 2155,4065
25+: P2.4 P3.1 pad.2@1060,4507.5 pad.2@1060,4642.5 PW4.3 R3.1 R3.2 | length 2735.7
  Top Layer w20: pad.2@1060,4510 1060,4642.5 pad.2@1060,4645
  Bottom Layer w50: PW4.3 482.92,5060.88 482.92,4930.48 480,4927.55 480,4730 567.5,4642.5 R3.2 2272.5,4642.5 2345,4570 P3.1
  Bottom Layer w60: P2.4 1024.85,4440 1060,4475.15 R3.1
25-: P2.2 P4.1 P5.4 pad.2@1735,4575 pad.2@1735,4710 PW1.4 R4.1 R4.2 | length 4030
  Top Layer w20: pad.2@1737.5,4572.5 pad.2@1737.5,4705
  Bottom Layer w50: P2.2 710,4535 750,4575 1610,4575 ; P5.4 1610,4575 ; R4.2 1737.5,4707.5 2677.5,4707.5 2765,4620 2765,4440 2855,4350 3600.28,4350 PW1.4 ; P4.1 1855,4545 1825,4575 1610,4575
+15: C1.2 C6.2 C9.2 C12.2 C14.2 C18.2 C20.2 C22.2 C24.2 C29.2 C36.2 C38.2 C40.2 C43.2 P6.1 P9.1 P10.3 P15.4 P20.3 P24.1 P27.4 P35.3 P47.3 P49.1 P56.4 pad.2@1557.5,2680 pad.2@1692.5,2680 pad.2@1835,2747.5 pad.2@1835,2882.5 pad.2@4677.5,680 pad.2@4812.5,680 pad.2@4945,887.5 pad.2@4945,1022.5 pad.2@5235,2625 pad.2@5370,2625 pad.2@5490,2727.5 pad.2@5490,2862.5 PW6.3 R12.1 R12.2 R13.1 R13.2 R20.1 R20.2 R21.1 R21.2 R44.1 R44.2 R45.1 R45.2 U1.8 U2.8 U3.8 | length 10679.7
  Top Layer w20: pad.2@4676.25,678.75 pad.2@4811.25,678.75 ; pad.2@4945,887.5 pad.2@4945,1022.5 ; pad.2@5232.5,2625 pad.2@5367.5,2625 ; pad.2@5495,2742.5 pad.2@5495,2877.5
  Top Layer w30: pad.2@1557.5,2680 pad.2@1692.5,2680 ; pad.2@1835,2747.5 pad.2@1835,2882.5
  Bottom Layer w20: U2.8 6569.17,2727.99 6627.99,2727.99 6665,2765 C24.2 C24.2@6665,2774.14
  Bottom Layer w30: U3.8 2655,845 2665,855 2670,855 2680,865 C36.2
  Bottom Layer w40: C9.2 C9.2@1806.85,3568.31 ; R12.2 1835,3072.5 C6.2 1812.5,3300 1840,3327.5 ; P9.1 1942.5,3327.5 1840,3327.5 ; U1.8 2880,2715 C14.2 2885,2725 2900,2740 2940,2740 2955,2755 2955,3250 2750,3455 2045,3455 1982.5,3517.5 1980.81,3517.5 1930,3568.31 C9.2@1806.85,3568.31 ; P20.3 C20.2 5575,3395 ; R21.2 5490,3045 5575,3130 C22.2 ; P24.1 C22.2 ; C24.2@6665,2774.14 6733.28,2774.14 6745,2785.86 6745,2947.57 6297.57,3395 5575,3395 ; C9.2@1806.85,3568.31 P10.3 1806.85,3481.43 1840,3448.28 1840,3327.5 ; C22.2 5575,3395
  Bottom Layer w50: P56.4 4572.5,492.5 4670,492.5 C43.2 4675,492.5 4675,677.5 R44.2
  Bottom Layer w60: P35.3 2494.31,1596.58 C29.2 2492.5,1477.5 2775,1195 2775,881.72 2763.28,870 C36.2 ; P47.3 4778.76,1686.91 4778.76,1793.76 C38.2 ; 4781.85,1735 4940,1735 5125,1550 P49.1 C40.2 5030,1345 4945,1260 R45.2 ; R44.1 4905,680 4940,715 4940,882.5 R45.1 ; P27.4 5227.5,2360 C18.2 5235,2357.5 R20.1 ; R20.2 5450,2625 5490,2665 R21.1
  Bottom Layer w80: P15.4 1492.78,2352.78 1540,2400 C12.2@1540,2527.5 ; C12.2@1540,2542.5 1540,2662.5 pad.2@1543.75,2666.25 ; pad.2@1702.5,2670 1823.28,2670 1835,2681.72 pad.2@1835,2740 ; P6.1@6629.21,4279.21 6685,4335 6685,4450 6685,4534.45 PW6.3
-15: C2.2 C5.2 C8.2 C11.2 C13.2 C17.2 C19.2 C21.2 C23.2 C28.2 C35.2 C37.2 C39.2 C42.2 P6.3 P8.4 P10.1 P16.4 P20.1 P23.4 P28.4 P35.1 P47.1 P48.4 P57.4 PW5.4 U1.4@2582.64,2865 U2.4@6362.64,2876.18 U3.4@2367.64,995 | length 9300.9
  Bottom Layer w20: P8.4 C5.2@1515,2985 ; C5.2@1520,2985 C5.2@1530,2985 ; P10.1 1610,3353.21 1587.5,3330.71 1587.5,3087.5 1530,3030 C5.2@1530,2985 ; P35.1 2297.46,1804.73 C28.2 ; C13.2 2575,2970 2560,2985 2560,3005 2535,3030 2437.5,3030 2387.5,2980 2387.5,2437.5 2302.78,2352.78 P16.4 1650,2352.78 1650,2355 1610,2395 1610,2850 1530,2930 C5.2 C5.2@1530,2985 ; 2581.81,2880 2581.81,2865 U1.4@2582.64,2865 ; P48.4 C39.2@4665,1150 ; P47.1 C37.2 4580,1530 4610,1500 4685,1500 4730,1455 4730,1235 4670,1175 4670,1105 4730,1045 4730,411.72 4756.72,385 5005,385 5030,410 C42.2 5032.5,492.5 5122.5,492.5 P57.4 ; C39.2@4670,1155 4678.28,1155 C39.2@4683.28,1160 ; P23.4 C21.2 ; C19.2@5283.15,3553.67 P20.1 5283.15,3461.47 5300,3444.62 5300,3090 5198.28,2988.28 5198.28,2940.78 C21.2 ; C23.2 6330,2940 6345,2925 6345,2877.99 U2.4@6346.81,2876.18 ; U2.4@6362.64,2876.18 U2.4@6346.81,2876.18 ; C21.2 5197.5,2867.5 5290,2775 5290,2256.72 5321.72,2225 5515,2225 5575,2285 C17.2 5577.5,2357.5 5672.5,2357.5 P28.4 6085,2360 6175,2450 6175,2818.21 6232.97,2876.18 U2.4@6346.81,2876.18
  Bottom Layer w60: P35.1 2297.46,1715.25 2310,1702.71 2310,1135 C35.2 ; 2367.64,1015 C35.2@2367.64,1070 ; C13.2 2580,2881.81 2581.81,2880
  Bottom Layer w80: PW5.4 6365.55,4346.02 P6.3
AC_INPUT: P53.1 P53.2 P55.2 | length 758.7
  Bottom Layer w80: P53.1 P53.2 ; P53.2@4216.26,1026.26 P55.2
CMRR_COMMON: P40.2 P45.2 R31.2 R36.1 | length 519.3
  Bottom Layer w60: R31.2 290,925 290,865 315,840 ; R36.1 315,822.5 315,840 ; 270,925 320,975 P40.2@400,975 ; P45.2 401.06,828.72 326.28,828.72 315,840
GND: C1.1 C2.1 C3.1 C4.1 C5.1 C6.1 C8.1 C9.1 C11.1 C12.1 C13.1 C14.1 C17.1 C18.1 C19.1 C20.1 C21.1 C22.1 C23.1 C24.1 C26.1 C27.1 C28.1 C29.1 C30.1 C31.1 C32.1 C33.1 C34.1 C35.1 C36.1 C37.1 C38.1 C39.1 C40.1 C41.1 C42.1 C43.1 P4.2 P4.3 P6.2 P7.2 P10.2 P19.2 P20.2 P31.2 P34.2 P35.2 P44.2 P47.2 P52.2 P55.1 pad.2@1772.5,3400 pad.2@1907.5,3400 pad.2@2130,1395 pad.2@2130,1530 PW5.3 PW6.4 R5.1 R6.1 R15.1 R15.2 R19.1 R23.1 R28.1 R31.1 R35.1 R35.2 R41.2 U1.3 U2.3 | length 28737.1
  Top Layer w20: pad.2@2130,1395 pad.2@2130,1530
  Bottom Layer w20: 1410,1430 1375,1395 1375,1217.57 C27.1 1375,540 1387.5,527.5 1387.5,525 C33.1 1412.5,500 C34.1 ; 1505,1880 1518.43,1866.57 ; C8.1@1666.29,3395.36 1666.29,3361.29 1622.5,3317.5 1622.5,2947.5 1640,2930 1640,2566.72 1651.72,2555 1662.5,2555 C12.1 ; C8.1 R15.2 ; C11.1@1690,2430 C11.1 C12.1@1690,2535 ; 2490,2860 2417.5,2787.5 2417.5,2432.5 2570,2280 P19.2 ; 4757.5,1565 4760,1562.5 C39.1 4760,537.5 C43.1 ; C21.1 5332.5,3227.5 5390,3285 ; C21.1@5335,2940 5335,2810 5320,2795 5320,2402.5 C18.1 C17.1 ; P31.2 6235,2340 6205,2370 6205,2805.78 6225.4,2826.18 U2.3 6465,2826.18 ; 6450,2940 6465,2925 6465,2826.18 ; 6765,2690 6623.91,2690 6623.28,2690.63 6504.37,2690.63 6465,2730 6465,2826.18
  Bottom Layer w40: 1410,1430 C26.1 1515,1437.5 1515,1520 1515,1540 1520,1545 C30.1 ; C30.1@1518.43,1551.57 P34.2 1518.43,1866.57 ; R35.1 2130,1275 2200,1205 2200,748.43 2176.57,725 2135,725 2130,720 C32.1 2130,475 2165,440 P44.2 ; 6450,2940 6630,2940 6660,2910 6660,2865 C24.1
  Bottom Layer w45: R15.1 2670,3400 2885,3185 2885,2925 ; C13.1 2490,2860 2490,2850 2525,2815 U1.3 2671.57,2815 2695,2838.43 2695,2935 2710,2950 2860,2950 2885,2925 ; C14.1 2885,2925
  Bottom Layer w50: 1640,3095 C6.1 ; C3.1 1735,4035 1750,4020 C4.1 ; C3.1@1740,4215 1910,4215 1955,4260 P4.2 P4.3 ; PW5.3 5479.72,4645 5639.72,4805 7400,4805 7565.28,4639.72 PW6.4 ; P6.2 6530,4798.97
  Bottom Layer w60: R5.1 R6.1 65,3350 330,3615 1663.52,3615 C9.1@1710.21,3568.31 ; R28.1 65,850 65,1360 585,1880 1505,1880 2130,1880 ; C8.1 1685,3538.1 C9.1 ; R35.2 2130,1880 ; C36.1 2680,1058.28 2668.28,1070 C35.1 2465,1120 2402.5,1182.5 C29.1 2395.88,1601.38 P35.2 2395.88,1809.77 2387.5,1818.15 2387.5,1836.34 2343.84,1880 2130,1880 ; R23.1 4045,2985 4040,2990 4040,3395 4270,3625 5381.57,3625 ; P55.1@4119.75,1665.38 P55.1@4119.75,1682.29 ; 4757.5,1565 4690,1565 4690,1570 4675,1585 C37.1 4678.43,1593.43 P47.2 4678.43,1783.43 C38.1 4620,1865 4218.93,1865 4119.75,1765.81 P55.1@4119.75,1687.71 ; 4760,1562.5 4872.5,1450 C40.1 ; C43.1 C42.1 4940,580 5015,655 5015,810 5085,880 5240,880 5295,825 C41.1 R41.2 5663.43,821.57 P52.2 ; C19.1 5381.57,3558.59 5381.57,3625 ; C19.1@5381.58,3553.67 P20.2 5381.58,3472.29 5390,3463.87 C20.1 5390,3285 5435,3240 C22.1 ; 6765,2690 6850,2775 6850,2990 6215,3625 5381.57,3625 ; P55.1@4119.75,1682.29 4122.45,1685 P55.1@4119.75,1687.71 ; P55.1@4119.75,1682.29 P55.1@4119.75,1687.71
GND_MAKER: R29.1 R30.1 U3.3 | length 1451.8
  Bottom Layer w40: R29.1 1700,1805 1730,1775 R30.1 1795,1770 1875,1690 1875,1540 1950,1465 2175,1465 2250,1390 2250,1015 2320,945 U3.3
IN+_CMRR_1: P36.3 P41.1 | length 779.3
  Bottom Layer w70: P41.1@506.35,975 655,975 910,1230 P36.3
IN+_CMRR_2: P42.3 P46.1 pad.2@870,635 pad.2@870,770 R34.1 R34.2 | length 845.5
  Top Layer w20: pad.2@870,635 pad.2@870,770
  Bottom Layer w50: P46.1@507.31,830 507.31,829.04 810.96,829.04 R34.1 ; R34.2 900,605 P42.3
IN+_GBP_1: P48.3 P54.2 | length 425.2
  Bottom Layer w60: P54.2 4320,1165 4405,1250 P48.3
IN+_GBP_2: P54.1 P56.3 | length 500.9
  Bottom Layer w70: P54.1 4320,730 4455,595 P56.3
IN+_IOS: P22.1 P29.2 P32.2 R24.2 | length 861.4
  Bottom Layer w40: P22.1 4355,2950.53 4368.68,2936.85 4368.68,2863.68 R24.2 4368.28,2856.72 4368.28,2803.43 4391.72,2780 4515,2780 ; P32.2@4575,3200 4515,3140 4515,2780 ; P29.2 4515,2780
IN+_IOS_1: P23.3 P30.1 | length 471.3
  Bottom Layer w60: P30.1 4790,3200 4950,3040 P23.3
IN+_IOS_2: P27.3 P33.1 | length 633
  Bottom Layer w80: P33.1@4715,2770 4715,2600 4855,2460 P27.3
IN+_VOS: P13.2 P17.2 R6.2 R14.1 | length 2420.7
  Bottom Layer w40: R6.2 150,3105 145,3100 145,3095 130,3080 130,3045 ; P13.2 235,2600 150,2685 150,2686.22 130,2706.22 ; P17.2 140,3035 130,3045 ; R14.1@1070,2040 380,2040 130,2290 130,2706.22 ; 130,2706.22 130,3045
IN+_VOS_1: P8.3 P14.1 | length 980.7
  Bottom Layer w40: P14.1@474.4,3024.4 535,3085 995,3085 P8.3
IN+_VOS_2: P15.3 P18.1 | length 1012.4
  Bottom Layer w80: P18.1 570,2600 725,2445 1422.22,2445 P15.3
IN-_CMRR: P40.1 P45.1 R28.2 | length 847.7
  Bottom Layer w40: R28.2 165,733.43 188.43,710 372.86,710 392.86,730 P45.1 ; R28.2@170,840 160,840 155,845 155,855 135,875 135,877.43 130,882.43 130,1000 205,1075 P40.1
IN-_CMRR_1: P36.2 P41.2 | length 780.6
  Bottom Layer w70: P41.2 595,1075 850,1330 P36.2
IN-_CMRR_2: P42.2 P46.2 | length 685.4
  Bottom Layer w50: P46.2 728,730 753,705 P42.2
IN-_GBP_1: P48.1 P48.2 P50.1 pad.2@4677.5,1350 pad.2@4812.5,1350 R42.1 R42.2 | length 1263.2
  Top Layer w20: pad.2@4677.5,1350 pad.2@4812.5,1350
  Bottom Layer w20: R42.1 4855,1307.5 4855,995 4880,970 5075,970 5125,1020 5365,1020 P50.1
  Bottom Layer w30: P48.1 P48.2 R42.2
IN-_GBP_2: P50.2 P56.1 P56.2 pad.2@4677.5,900 pad.2@4812.5,900 R43.1 R43.2 | length 970.4
  Top Layer w20: pad.2@4677.5,900 pad.2@4812.5,900
  Bottom Layer w20: R43.1 4852.5,940 5330.78,940 5355.78,915 P50.2
  Bottom Layer w60: P56.2 P56.1 4572.5,795 R43.2
IN-_IOS: P22.2 P29.1 P32.1 pad.2@4442.5,3060 pad.2@4577.5,3060 R17.2 R27.1 R27.2 | length 783.1
  Top Layer w20: pad.2@4445,3060 pad.2@4580,3060
  Bottom Layer w60: R27.1 P22.2 4360,3065 4360,3155 R17.2 4505,3300 4570,3300 ; R27.2 4610,3027.5 P29.1
IN-_IOS_1: P23.2 P30.2 | length 471.3
  Bottom Layer w60: P30.2 4820,3300 4980,3140 P23.2
IN-_IOS_2: P27.2 P33.2 | length 659.5
  Bottom Layer w80: P33.2 4818.14,2880 4865,2833.14 4865,2625 4930,2560 P27.2
IN-_VOS: P13.1 P17.1 R5.2 | length 425.3
  Bottom Layer w60: R5.2 224.85,2935 P17.1 P13.1
IN-_VOS_1: P8.2 P14.2 pad.2@765,3017.5 pad.2@765,3152.5 R9.1 R9.2 | length 1104.7
  Top Layer w20: pad.2@765,3017.5 pad.2@765,3152.5
  Bottom Layer w60: R9.2 797.5,3185 P8.2
  Bottom Layer w80: P14.2 682.5,2935 pad.2@748.75,3001.25
IN-_VOS_2: P15.2 P18.2 | length 1006
  Bottom Layer w80: P18.2 635,2700 782.22,2552.78 P15.2
IOS_COMMON: P21.2 R23.2 R24.1 R26.1 | length 1353.1
  Bottom Layer w70: R23.2 4243.65,2965 4248.65,2960 P21.2 4250,2947.82 4275,2922.82 R24.1 4275,2455 4642.36,2087.64 R26.1
NetC7_1: C7.1 P19.1 R7.2 R14.2 U1.1 | length 2492.6
  Bottom Layer w40: R14.2 1277.5,1975 2655,1975 2741.58,2061.57 2741.58,2335 ; U1.1 2660,2715 2720,2655 2791.57,2655 2820,2626.57 2820,2546.72 2793.28,2520 2745,2520 2739.17,2514.17 2739.17,2335
NetC7_2: C7.2 C10.2 R8.2 U1.2 | length 534.4
  Bottom Layer w30: R8.2@2467.43,2677.57 2467.43,2747.43 2485,2765 U1.2 U1.2@2605,2765 ; R8.2 2467.5,2617.5 2490,2595 C10.2 2555,2530 2575,2510 2640,2510 C7.2@2645,2515
NetC10_1: C10.1 R7.1 | length 90
  Bottom Layer w50: C10.1 R7.1
NetC15_1: C15.1 P31.1 R22.2 R26.2 U2.1 | length 2657.9
  Bottom Layer w40: R26.2 4933.51,2011.49 4965,1980 6350,1980 6468.43,2098.43 P31.1 6468.43,2536.57 6465,2540 ; U2.1 6338.19,2726.18 6335,2722.99 6335,2565 6360,2540 C15.1@6402.5,2540 ; C15.1 6407.5,2540 6465,2540 ; R22.2 6585,2562.57 6562.43,2540 6465,2540
NetC15_2: C15.2 C16.2 R25.2 U2.2 | length 331.7
  Bottom Layer w40: C15.2 C16.2 6267.5,2780 6271.32,2776.18 U2.2
NetC16_1: C16.1 R22.1 | length 94.8
  Bottom Layer w50: C16.1 6407.5,2645 6417.5,2645 6418.13,2645.63 R22.1
NetC25_1: C25.1 P44.1 R32.2 R36.2 U3.1 | length 3716.1
  Bottom Layer w30: U3.1 2392.76,845 2399.13,838.62 2399.13,834.58 2406.29,827.43 2406.29,776.21 C25.1 ; R32.2 2395,685 2405,695 2405,762.5 C25.1 ; C25.1@2437.5,745 C25.1
  Bottom Layer w100: 265,605 265,285 455,95 2565,95 2696.42,226.42 P44.1@2696.42,423.58 ; C25.1@2437.5,745 2695,487.5 P44.1@2695,455
NetC25_2: C25.2 R32.1 R33.2 U3.2 | length 327.9
  Bottom Layer w40: R32.1 2298.19,685 2267.5,715.69 R33.2 U3.2
NetC32_2: C32.2 P39.1 P39.2 R33.1 | length 308.8
  Bottom Layer w60: P39.1 P39.2 2031.7,921.7 2090.8,921.7 2117.5,895 R33.1 ; C32.2 R33.1@2130,892.5
NetC41_2: C41.2 P51.1 P51.2 P52.1 R41.1 | length 482.1
  Bottom Layer w80: P51.2 P51.1 C41.2 R41.1 5665,920 P52.1
NetP12_1: P12.1 P12.2 R8.1 | length 226.4
  Bottom Layer w70: P12.2 2305,2702.5 2330,2677.5 R8.1
NetP21_1: P21.1 R17.1 R19.2 | length 229.1
  Bottom Layer w60: R19.2 P21.1 4247.13,3062.87 4247.13,3073.48 4245.46,3075.15 4245.46,3130.46 R17.1
NetP26_1: P26.1 P26.2 R25.1 | length 202.3
  Bottom Layer w60: P26.1 6020.16,2770 ; P26.2 6020.16,2770 ; R25.1 6020.16,2770
NetPW1_3: PW1.3 PW3.4 | length 1025.2
  Bottom Layer w50: PW3.4 2711.77,5068.23 2904.45,4875.55 PW1.3
NetPW3_3: PW3.3 PW4.4 | length 604.4
  Bottom Layer w100: PW4.4@1088.33,5070 PW3.3@1692.78,5070
NULL: P1.1 PW1.2 PW2.2 PW3.2 PW4.2 PW5.2 PW6.2 | length 7844.9
  Bottom Layer w100: P1.1 685.28,6054.09 ; PW4.2 685.28,6054.09 ; 1875,6055 3042.05,6055 ; PW3.2@1885,6210.73 1885,6065 1874.09,6054.09 685.28,6054.09 ; PW1.2@3200.28,6213.23 3042.05,6055 ; PW2.2 4480,6203.5 4480,6055 ; PW5.2 5616.77,6055 ; PW6.2 6974.72,6164.72 6865,6055 5616.77,6055 ; 3042.05,6055 4302.05,6055 4371.77,6055 4480,6055 ; 4480,6055 5571.77,6055 5616.77,6055
OPA+: C4.2 C26.2 C30.2 C33.2 P3.2 P3.3 P7.3 P34.3 P37.1 P42.4 pad.2@1290,695 pad.2@1425,695 pad.2@1595,935 pad.2@1595,1070 pad.2@2087.5,4205 pad.2@2222.5,4205 R2.1 R2.2 R30.2 R37.1 R37.2 R38.1 R38.2 | length 2778.3
  Top Layer w20: pad.2@1290,695 pad.2@1425,695 ; pad.2@1595,932.5 pad.2@1595,1067.5 ; pad.2@2085,4205 2087.5,4205 pad.2@2220,4205
  Bottom Layer w40: P42.4 C33.2 1272.5,677.5 R37.1 ; R37.2 1595,865 R38.1 ; R38.2 1595,1382.5 C26.2 ; P34.3@1615,1676.34 C30.2 1620,1545 1625,1540 1625,1535 1642.5,1517.5 C26.2 ; P34.3 1617.75,1679.1 1729.1,1679.1 R30.2 ; P37.1 C26.2
  Bottom Layer w60: C4.2 1844.21,4020.79 1844.21,4114.21 P7.3 2050,4115 2081.32,4146.32 2081.32,4198.82 R2.2 ; R2.1 2400,4205 2445,4250 P3.2 ; P3.2@2457.5,4440 P3.3
OPA-: C3.2 C27.2 C31.2 C34.2 P5.2 P5.3 P7.1 P34.1 P36.4 P43.4 R29.2 | length 2859.8
  Bottom Layer w20: P36.4 C27.2@1275,1130 ; 1345,1602.81 1345,1246.72 1341.81,1243.52 1341.81,1226.81 1285,1170 C27.2 1285,1082.5 1342.5,1025 1342.5,467.5 1400.5,409.5 1589.5,409.5 1636.72,456.72 1636.72,496.72 C34.2 1642.5,502.5 1732.5,502.5 P43.4
  Bottom Layer w35: C31.2 1270,1785 1277.5,1792.5 1282.5,1792.5 1290,1800 R29.2@1442.5,1800 ; 1345,1602.81 1387.89,1645.69 1393.03,1645.69 1420,1672.66 P34.1@1420,1677.81 ; P34.1@1420.24,1678.19 1420.24,1777.74 R29.2@1442.5,1800 ; R29.2 R29.2@1442.5,1800
  Bottom Layer w60: P5.2 1460,4440 ; P5.3 1460,4440 ; C3.2 1645.79,4214.21 P7.1@1645.79,4121.32 ; P7.1 1520,4115 1460,4175 1460,4440
OUT_CMRR_1: P36.1 P38.1 pad.2@1295,1285 pad.2@1430,1285 R39.1 R39.2 | length 1061.8
  Top Layer w20: pad.2@1295,1285 pad.2@1430,1285
  Bottom Layer w20: R39.2 1490,1225 1490,1040 1515,1015 P38.1
  Bottom Layer w30: P36.1 1187.5,1422.5 1262.5,1422.5 1295,1390 R39.1
OUT_CMRR_2: P38.2 P42.1 pad.2@1292.5,895 pad.2@1427.5,895 R40.1 R40.2 | length 838.3
  Top Layer w20: pad.2@1292.5,895 pad.2@1427.5,895
  Bottom Layer w20: R40.1 1517.5,985 1720,985 1790,915 P38.2
  Bottom Layer w70: P42.1 1180.23,805.23 1180.23,860.23 1215,895 pad.2@1275,895
OUT_IOS_1: P23.1 P25.1 pad.2@5247.5,3150 pad.2@5382.5,3150 R16.1 R16.2 | length 1177.5
  Top Layer w20: pad.2@5252.5,3150 pad.2@5387.5,3150
  Bottom Layer w20: R16.1 5402.5,3130 5402.5,3120.78 5405,3118.28 5405,2845 5437.5,2812.5 5907.01,2812.5 P25.1
  Bottom Layer w30: P23.1 5220,3240 5247.5,3212.5 R16.2
OUT_IOS_2: P25.2 P27.1 pad.2@5235,2720 pad.2@5370,2720 R18.1 R18.2 | length 895.8
  Top Layer w20: pad.2@5227.5,2720 pad.2@5362.5,2720
  Bottom Layer w20: R18.1 5432.5,2782.5 5727.5,2782.5 5795,2715 5909.51,2715 P25.2
  Bottom Layer w60: P27.1 5128.61,2668.61 5128.61,2702.43 5146.18,2720 R18.2
OUT_VOS_1: P8.1 P11.1 pad.2@1537.5,3235 pad.2@1672.5,3235 R10.1 R10.2 | length 1138.1
  Top Layer w20: pad.2@1537.5,3235 pad.2@1672.5,3235
  Bottom Layer w20: R10.2 1745,3162.5 1745,2865 1780,2830 2140,2830 P11.1
  Bottom Layer w70: P8.1 1487.5,3285 1494.17,3278.33 pad.2@1523.75,3248.75
OUT_VOS_2: P11.2 P15.1 pad.2@1557.5,2795 pad.2@1692.5,2795 R11.1 R11.2 | length 888.3
  Top Layer w30: pad.2@1557.5,2795 pad.2@1692.5,2795
  Bottom Layer w20: pad.2@1692.5,2790 1702.5,2800 2190,2800 P11.2
  Bottom Layer w30: P15.1 1430,2740 1485,2795 R11.1
PHASE: P1.3 PW1.1 PW2.1 PW3.1 PW4.1 PW5.1 PW6.1 | length 8043.1
  Bottom Layer w100: P1.3 875.28,6365.91 ; PW4.1 875.28,6365.91 ; PW3.1 2077.78,6365.91 ; PW1.1@3495.55,6213.23 3342.87,6365.91 ; PW2.1 4655.28,6365.91 ; PW5.1 5917.6,6365.91 ; PW6.1 7117.32,6365.91 5917.6,6365.91 ; 875.28,6365.91 2077.78,6365.91 ; 2077.78,6365.91 3342.87,6365.91 ; 3342.87,6365.91 4655.28,6365.91 ; 4655.28,6365.91 5917.6,6365.91
pads on no net: C1.0 C2.0 C3.0 C4.0 C5.0 C6.0 C7.0 C8.0 C9.0 C10.0 C11.0 C12.0 C13.0 C14.0 C15.0 C16.0 C17.0 C18.0 C19.0 C20.0 C21.0 C22.0 C23.0 C24.0 C25.0 C26.0 C27.0 C28.0 C29.0 C30.0 C31.0 C32.0 C33.0 C34.0 C35.0 C36.0 C37.0 C38.0 C39.0 C40.0 C41.0 C42.0 C43.0 P1.2 P9.2 P9.3 P9.4 P15.5 P15.6 P15.7 P16.1 P16.2 P16.3 P16.5 P16.6 P16.7 P24.2 P24.3 P24.4 P27.5 P27.6 P27.7 P28.1 P28.2 P28.3 P28.5 P28.6 P28.7 P37.2 P37.3 P37.4 P42.5 P42.6 P42.7 P43.1 P43.2 P43.3 P43.5 P43.6 P43.7 P49.2 P49.3 P49.4 P56.5 P56.6 P56.7 P57.1 P57.2 P57.3 P57.5 P57.6 P57.7 R1.0 R2.0 R3.0 R4.0 R5.0 R6.0 R7.0 R8.0 R9.0 R10.0 R11.0 R12.0 R13.0 R14.0 R15.0 R16.0 R17.0 R18.0 R19.0 R20.0 R21.0 R22.0 R23.0 R24.0 R25.0 R26.0 R27.0 R28.0 R29.0 R30.0 R31.0 R32.0 R33.0 R34.0 R35.0 R36.0 R37.0 R38.0 R39.0 R40.0 R41.0 R42.0 R43.0 R44.0 R45.0 U1.4@2685,2738.82 U1.4@2685,2841.18 U1.5 U1.6 U1.7 U2.4@6465,2750 U2.4@6465,2852.36 U2.5 U2.6 U2.7 U3.4@2470,868.82 U3.4@2470,971.18 U3.5 U3.6 U3.7

## Keep-outs
Keep-Out Layer:
  lines w10: 5,1925 3010,1925 3995,1925 ; 5,3670 7755,3670 ; 3965,5 7755,5 7755,6460 5,6460 5,5 2075,5 3995,5 3995,1925 ; 3995,3670 3995,1925 ; 7755,1925 3995,1925